# EAGLE board PaddleClock-base-v1a (EAGLE 5.07)
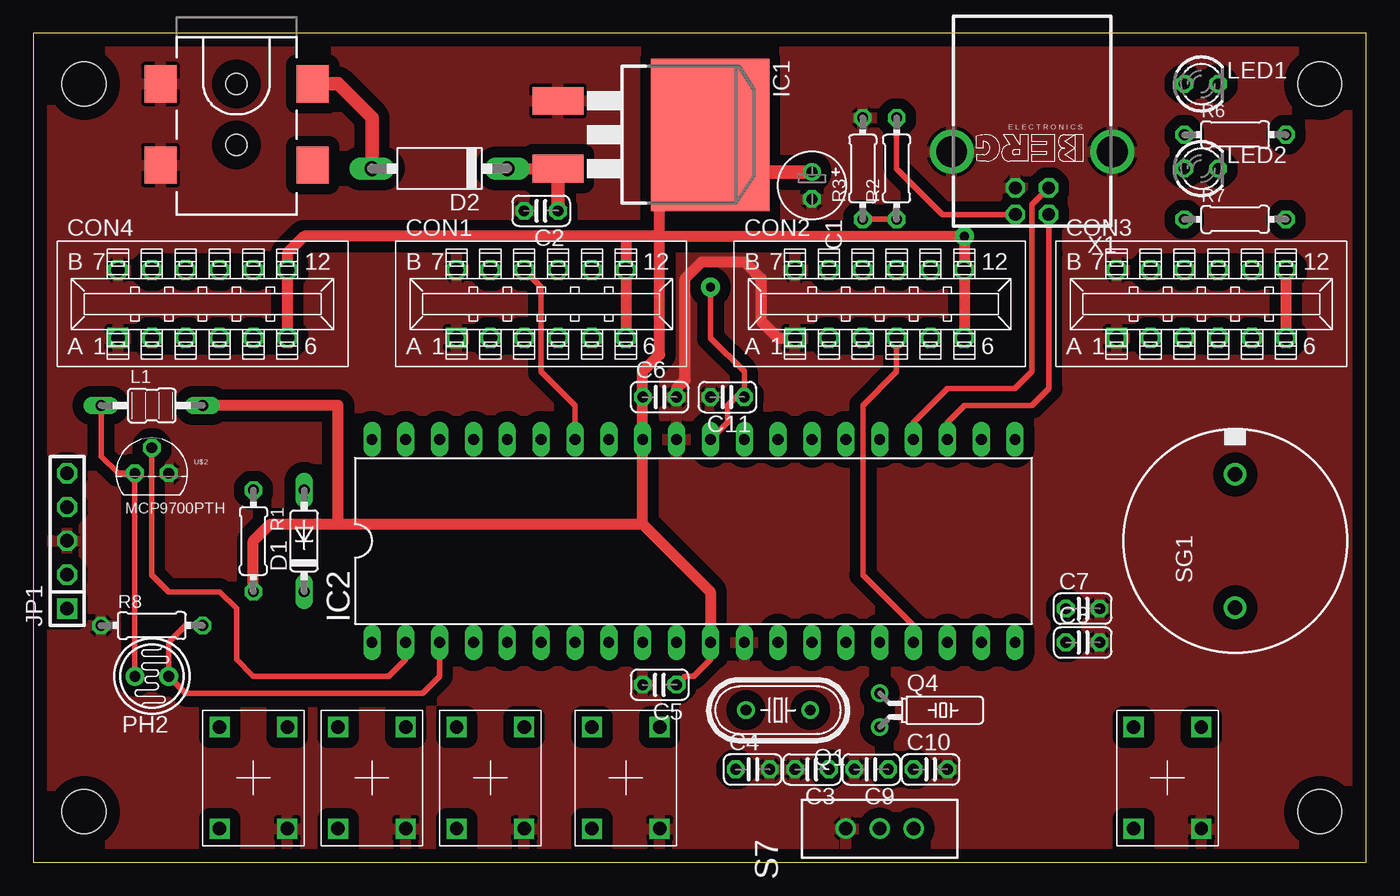
[diagram p0: board, top side]
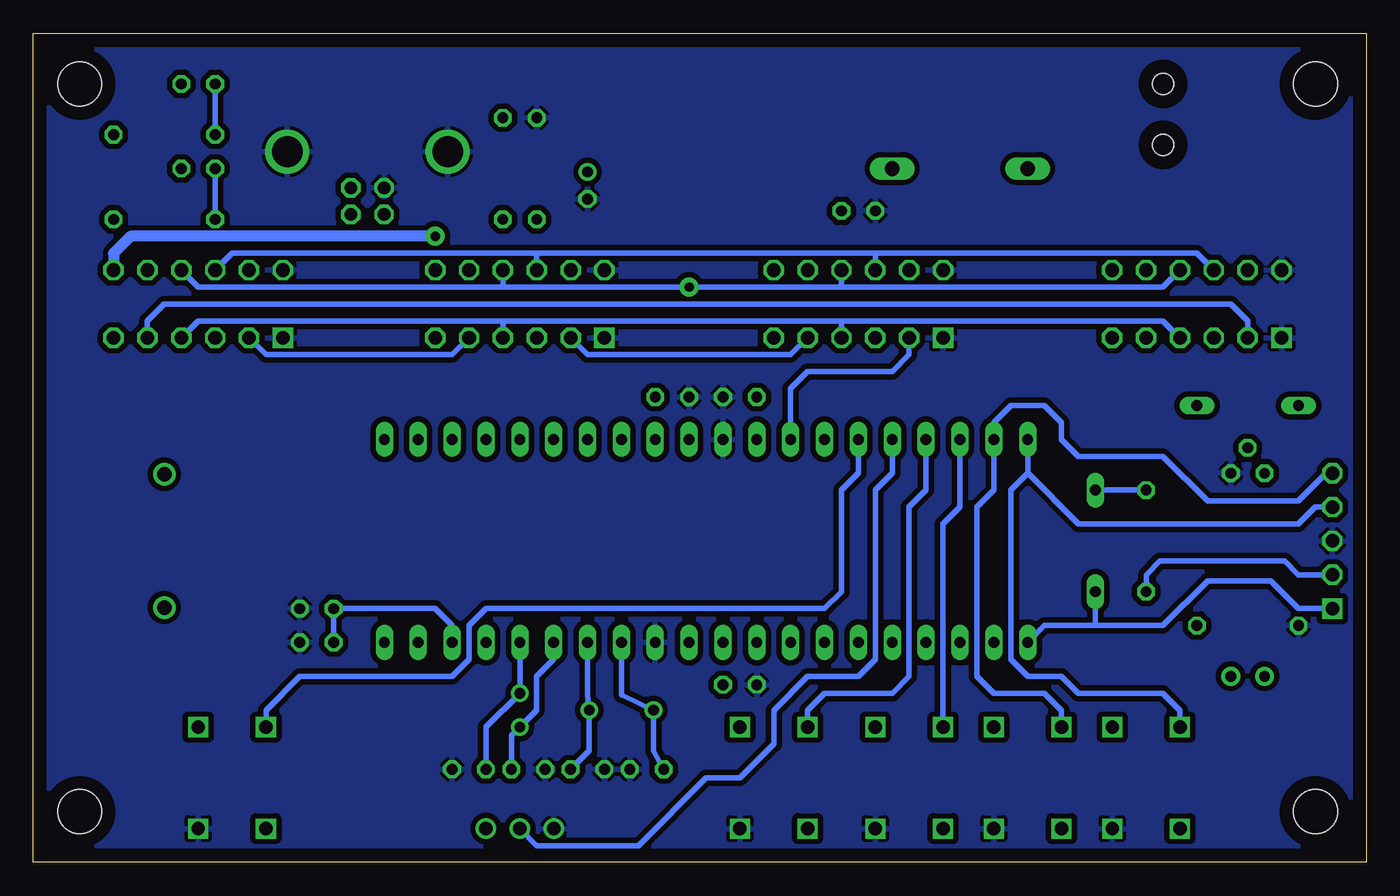
[diagram p1: board, bottom side, seen from below]

Size 100 x 62.22 mm. Coordinates in mm from the lower left corner, seen from the top.
Outline: 0,0 100,0 100,62.22 0,62.22 0,0
Copper layers (1*16): Top 0.035mm / dielectric 1.5mm / Bottom 0.035mm
Design rules "default": minimum track width 10mil, minimum drill 24mil, track to track 8mil, track to pad 8mil, pad to pad 8mil, via to via 8mil, smd to smd 8mil, copper to edge 40mil, drill to drill 8mil, minimum pad ring 10mil, minimum via ring 8mil, stop-mask expansion 4mil, vias tented up to drill 0mil, thermal gap 10mil

## Footprints (pad centres in the part's own frame; a part is rotated, then mirrored left to right if it is on the bottom)
E2-5 = drill 0.813 pad 1.27 round: + -1.016,0 | drill 0.813 pad 1.27 octagon: - 1.016,0
C025-024X044 = drill 0.813 octagon: 1 -1.27,0; 2 1.27,0
EDGE_CONNECTOR_6X2 = drill 1.02 square: 1 -6.35,-2.54 | drill 1.02 octagon: 2 -3.81,-2.54; 3 -1.27,-2.54; 4 1.27,-2.54; 5 3.81,-2.54; 6 6.35,-2.54; 7 -6.35,2.54; 8 -3.81,2.54; 9 -1.27,2.54; 10 1.27,2.54; 11 3.81,2.54; 12 6.35,2.54
DO35-7 = drill 0.813 long: A 3.81,0; C -3.81,0
P1-10 = drill 1.118 long: A 5.08,0; C -5.08,0
D2PACK = smd 2.083 x 3.81: 1 -2.54,-8.89; 3 2.54,-8.89 | smd 11.43 x 8.89: 2 0,2.54
DIL40 = drill 0.813 long: 1 -24.13,-7.62; 2 -21.59,-7.62; 3 -19.05,-7.62; 4 -16.51,-7.62; 5 -13.97,-7.62; 6 -11.43,-7.62; 7 -8.89,-7.62; 8 -6.35,-7.62; 9 -3.81,-7.62; 10 -1.27,-7.62; 11 1.27,-7.62; 12 3.81,-7.62; 13 6.35,-7.62; 14 8.89,-7.62; 15 11.43,-7.62; 16 13.97,-7.62; 17 16.51,-7.62; 18 19.05,-7.62; 19 21.59,-7.62; 20 24.13,-7.62; 21 24.13,7.62; 22 21.59,7.62; 23 19.05,7.62; 24 16.51,7.62; 25 13.97,7.62; 26 11.43,7.62; 27 8.89,7.62; 28 6.35,7.62; 29 3.81,7.62; 30 1.27,7.62; 31 -1.27,7.62; 32 -3.81,7.62; 33 -6.35,7.62; 34 -8.89,7.62; 35 -11.43,7.62; 36 -13.97,7.62; 37 -16.51,7.62; 38 -19.05,7.62; 39 -21.59,7.62; 40 -24.13,7.62
POWER_JACK_SMD = smd 2.8 x 2.4: GND 0,-5.7; P$4 6.1,-5.7; VIN0 0,5.7; VIN1 6.1,5.7 | hole 1.6: 0,0; 4.572,0
1X05 = drill 1.016 square: 1 -5.08,0 | drill 1.016 octagon: 2 -2.54,0; 3 0,0; 4 2.54,0; 5 5.08,0
MMICC7 = drill 0.813 long: 1 -3.81,0; 2 3.81,0
LED3MM = drill 0.813 octagon: A -1.27,0; K 1.27,0
TO46-VT200 = drill 0.8 pad 1.4 round: 1 -1.27,0; 2 1.27,0
HC49U-V = drill 0.813 round: 1 -2.413,0; 2 2.413,0
TC26H = drill 0.813 round: 1 -1.27,0; 2 1.27,0
0204/7 = drill 0.813 octagon: 1 -3.81,0; 2 3.81,0
KSA_SEALED_TAC_SWITCH = drill 1 square: P$1 -3.81,2.54; P$2 3.81,2.54; P$3 -3.81,-2.54; P$4 3.81,-2.54
SWITCH-SPDT = drill 1.016 round: 1 0,2.54; 2 0,0; 3 0,-2.54
EFBAA40D101 = drill 1.1 pad 1.676 round: 1 -5,0; 2 5,0
STAND-OFF = hole 3.302: 0,0
TO-92 = drill 0.813 octagon: 1 -1.27,0; 2 0,1.905; 3 1.27,0
PN61729-S = drill 0.95 octagon: 1 1.25,4.71; 2 -1.25,4.71; 3 -1.25,2.71; 4 1.25,2.71 | drill 2.3 pad 2.9 round: S1 -6.02,0; S2 6.02,0

## Placement (x,y rotation side)
C1  [E2-5]  58.42,50.8 270 top
C2  [C025-024X044]  38.1,48.9 180 top
C3  [C025-024X044]  58.42,6.99 180 top
C4  [C025-024X044]  53.98,6.99 0 top
C5  [C025-024X044]  46.99,13.34 180 top
C6  [C025-024X044]  46.99,34.92 0 top
C7  [C025-024X044]  78.74,19.05 0 top
C8  [C025-024X044]  78.74,16.51 0 top
C9  [C025-024X044]  62.87,6.99 180 top
C10  [C025-024X044]  67.31,6.99 0 top
C11  [C025-024X044]  52.07,34.92 180 top
CON1  EDGE_CONNECTOR_6X2  [EDGE_CONNECTOR_6X2]  38.1,41.91 0 top
CON2  EDGE_CONNECTOR_6X2  [EDGE_CONNECTOR_6X2]  63.5,41.91 0 top
CON3  EDGE_CONNECTOR_6X2  [EDGE_CONNECTOR_6X2]  87.63,41.91 0 top
CON4  EDGE_CONNECTOR_6X2  [EDGE_CONNECTOR_6X2]  12.7,41.91 0 top
D1  1N4148DO35-7  [DO35-7]  20.32,24.13 90 top
D2  BA157  [P1-10]  30.48,52.07 180 top
IC1  LD117AD2MTR  [D2PACK]  48.26,54.61 270 top
IC2  PIC18F4550_40  [DIL40]  49.53,24.13 0 top
J1  POWER_JACKSMD  [POWER_JACK_SMD]  15.24,58.42 270 top
JP1  [1X05]  2.54,24.13 90 top
L1  MMICC7  [MMICC7]  8.89,34.29 0 top
LED1  [LED3MM]  87.63,58.42 0 top
LED2  [LED3MM]  87.63,52.07 0 top
PH2  VT20N1  [TO46-VT200]  8.89,13.97 0 top
Q1  [HC49U-V]  55.88,11.43 180 top
Q4  [TC26H]  63.5,11.43 270 top
R1  [0204/7]  16.51,24.13 270 top
R2  100K  [0204/7]  64.77,52.07 90 top
R3  100K  [0204/7]  62.23,52.07 90 top
R6  [0204/7]  90.17,54.61 0 top
R7  [0204/7]  90.17,48.26 0 top
R8  [0204/7]  8.89,17.78 0 top
S1  [KSA_SEALED_TAC_SWITCH]  85.09,6.35 270 top
S3  [KSA_SEALED_TAC_SWITCH]  44.45,6.35 270 top
S4  [KSA_SEALED_TAC_SWITCH]  34.29,6.35 270 top
S5  [KSA_SEALED_TAC_SWITCH]  25.4,6.35 270 top
S6  [KSA_SEALED_TAC_SWITCH]  16.51,6.35 270 top
S7  [SWITCH-SPDT]  63.5,2.54 90 top
SG1  EFBAA40D101  [EFBAA40D101]  90.17,24.13 90 top
U$1  STAND-OFF  [STAND-OFF]  3.81,58.42 0 top
U$2  MCP9700PTH  [TO-92]  8.89,29.21 0 top
U$3  STAND-OFF  [STAND-OFF]  3.81,3.81 0 top
U$4  STAND-OFF  [STAND-OFF]  96.52,3.81 0 top
U$5  STAND-OFF  [STAND-OFF]  96.52,58.42 0 top
X1  PN61729-S  [PN61729-S]  74.93,53.34 180 top

## Library data of the parts
C1-C11 R1-R3 R6-R8 = rcl
CON1-CON4 = dp_devices
D1 D2 = diode
IC1 = v-reg
IC2 = microchip
J1 S1 S3-S7 U$1-U$5 = SparkFun
JP1 = pinhead-2
L1 = inductors
LED1 LED2 = led
PH2 = photo-elements
Q1 Q4 = crystal
SG1 = buzzer
X1 = con-berg

## Nets
!OE: CON1.4 CON2.4 CON3.4 CON4.4 IC2.17
BUT_AE: IC2.36 S7.2
BUT_AL: IC2.40 JP1.4 S6.P$3
BUT_DN: IC2.39 JP1.5 S5.P$3
BUT_SET: IC2.37 S3.P$3
BUT_SNZ: IC2.35 S1.P$3
BUT_UP: IC2.38 S4.P$3
CLK: CON1.9 CON2.9 CON3.9 CON4.9 IC2.34
DO: CON1.2 IC2.33
GND: C1.- C2.2 C3.2 C4.2 C5.2 C6.2 C7.2 C8.2 C9.2 C10.2 C11.2 CON1.1 CON1.7 CON2.1 CON2.7 CON3.1 CON3.7 CON4.1 CON4.7 IC1.1 IC2.12 IC2.31 J1.GND J1.P$4 JP1.3 R3.2 R8.1 S1.P$2 S3.P$2 S4.P$2 S5.P$2 S6.P$2 S7.1 U$2.3 X1.4 X1.S1 X1.S2
LAT: C11.1 CON1.10 CON2.10 CON3.10 CON4.10 IC2.30
MCLR: D1.C IC2.1 JP1.1
N$1: IC2.23 X1.2
N$2: IC2.24 X1.3
N$3: CON1.5 CON2.2
N$4: C2.1 D2.C IC1.3
N$5: CON3.5 CON4.2
N$8: D1.A R1.1
N$9: R2.2 X1.1
N$10: R2.1 R3.1
N$11: L1.1 PH2.1 U$2.1
N$12: SG1.2
N$13: SG1.1
N$14: LED1.A R6.1
N$15: C7.1 C8.1 IC2.18
N$16: CON2.5 CON3.2
N$18: LED2.A R7.1
N$20: IC2.4
N$21: IC2.5
N$22: IC2.6
N$23: IC2.7
N$24: D2.A J1.VIN0
N$26: C9.1 IC2.15 Q4.2
N$27: C10.1 IC2.16 Q4.1
N$28: C3.1 IC2.14 Q1.1
N$29: C4.1 IC2.13 Q1.2
PHOTOR: IC2.3 PH2.2 R8.2
TEMP: IC2.2 U$2.2
V+: C1.+ C5.1 C6.1 CON1.6 CON1.12 CON2.6 CON2.12 CON3.6 CON3.12 CON4.6 CON4.12 IC1.2 IC2.11 IC2.32 JP1.2 L1.2 R1.2

## Tracks (layer width: path | path; a pad name or v marks a point on that pad's centre or on a via)
!OE
  Top 0.406: IC2.17 66.04,17.78 62.23,21.59 62.23,34.29 64.77,36.83 CON2.4
  Bottom 0.406: 39.37,40.64 15.24,40.64 CON4.4 | 39.37,40.64 64.77,40.64 | 64.77,40.64 87.63,40.64 CON3.4 | 39.37,40.64 CON1.4 | 64.77,40.64 CON2.4
BUT_AE
  Bottom 0.406: S7.2 62.23,1.27 54.61,1.27 49.53,6.35 46.99,6.35 44.45,8.89 44.45,11.43 41.91,13.97 38.1,13.97 36.83,15.24 36.83,27.94 35.56,29.21 IC2.36
BUT_AL
  Bottom 0.406: S6.P$3 13.97,11.43 15.24,12.7 21.59,12.7 22.86,13.97 25.4,13.97 26.67,15.24 26.67,27.94 25.4,29.21 | 25.4,29.21 IC2.40 | 25.4,29.21 21.59,25.4 5.08,25.4 3.81,26.67 JP1.4
BUT_DN
  Bottom 0.406: S5.P$3 22.86,11.43 24.13,12.7 27.94,12.7 29.21,13.97 29.21,26.67 27.94,27.94 IC2.39 27.94,33.02 26.67,34.29 24.13,34.29 22.86,33.02 22.86,31.75 21.59,30.48 15.24,30.48 11.89,27.13 5.08,27.13 3,29.21 JP1.5
BUT_SET
  Bottom 0.406: S3.P$3 41.91,11.43 40.64,12.7 35.56,12.7 34.29,13.97 34.29,26.67 33.02,27.94 IC2.37
BUT_SNZ
  Bottom 0.406: IC2.35 38.1,29.21 39.37,27.94 39.37,20.32 40.64,19.05 66.04,19.05 67.31,17.78 67.31,15.24 68.58,13.97 80.01,13.97 82.55,11.43 S1.P$3
BUT_UP
  Bottom 0.406: S4.P$3 31.75,25.4 30.48,26.67 IC2.38
CLK
  Top 0.406: IC2.34 40.64,34.29 38.1,36.83 38.1,43.18 CON1.9
  Bottom 0.406: CON4.9 12.7,45.72 36.83,45.72 | 36.83,45.72 CON1.9 | 36.83,45.72 62.23,45.72 | 62.23,45.72 CON2.9 | 62.23,45.72 85.09,45.72 CON3.9
DO
  Bottom 0.406: CON1.2 34.29,38.1 35.56,36.83 41.91,36.83 43.18,35.56 IC2.33
GND
  Top 0.813: CON2.1 55.88,39.37 54.61,40.64 54.61,43.81 53.34,45.09 50.16,45.09 48.9,43.81 48.9,36.2 48.26,35.56 C6.2
  pour Bottom (isolate 0.406): 0,62.23 100.33,62.23 100.33,0 0,0
  pour Top (isolate 0.813): 0,62.23 100.33,62.23 100.33,0 0,0
LAT  (via drill 0.7 pad 1.42)
  Top 0.406: IC2.30 52.07,33.02 52.07,34.29 52.7,34.92 C11.1 53.34,36.83 50.8,39.37 v50.8,43.18
  Bottom 0.406: CON4.10 15.24,43.18 39.37,43.18 | 39.37,43.18 CON1.10 | 39.37,43.18 v50.8,43.18 64.77,43.18 | 64.77,43.18 CON2.10 | 64.77,43.18 87.63,43.18 CON3.10
MCLR
  Bottom 0.406: 20.32,17.78 15.24,17.78 11.89,21.13 7.16,21.13 5.08,19.05 JP1.1 | 20.32,17.78 24.13,17.78 IC2.1 | 20.32,17.78 D1.C
N$1
  Top 0.406: IC2.23 68.58,33.02 69.85,34.29 74.93,34.29 76.2,35.56 76.2,45.72 76.18,45.74 X1.2
N$2
  Top 0.406: X1.3 74.93,49.38 74.93,36.83 73.66,35.56 68.58,35.56 66.04,33.02 IC2.24
N$3
  Bottom 0.406: CON1.5 43.18,38.1 58.42,38.1 CON2.2
N$4
  Top 0.813: D2.C IC1.3
  Top 1.016: IC1.3 C2.1
N$5
  Bottom 0.406: CON4.2 8.89,40.64 10.16,41.91 90.17,41.91 91.44,40.64 CON3.5
N$8
  Bottom 0.406: R1.1 D1.A
N$9
  Top 0.406: X1.1 68.21,48.63 64.77,52.07 R2.2
N$10
  Top 0.406: R3.1 R2.1
N$11
  Top 0.406: PH2.1 U$2.1 6.35,29.21 5.08,30.48 L1.1
N$14
  Bottom 0.406: R6.1 LED1.A
N$15
  Bottom 0.406: IC2.18 68.58,17.78 69.85,19.05 C7.1 C8.1
N$16
  Bottom 0.406: CON3.2 82.55,38.1 68.58,38.1 CON2.5
N$18
  Bottom 0.406: R7.1 LED2.A
N$24
  Top 1.016: J1.VIN0 22.86,58.42 25.4,55.88 D2.A
N$26
  Bottom 0.406: C9.1 64.14,9.53 Q4.2 62.23,11.43 62.23,13.97 60.96,15.24 IC2.15
N$27
  Bottom 0.406: IC2.16 Q4.1 66.04,10.16 C10.1
N$28
  Bottom 0.406: IC2.14 58.42,12.57 Q1.1 58.29,8.38 C3.1
N$29
  Bottom 0.406: IC2.13 55.88,12.57 Q1.2 53.47,8.38 C4.1
PHOTOR
  Top 0.406: R8.2 11.43,17.78 10.16,16.51 PH2.2 11.43,12.7 29.21,12.7 30.48,13.97 IC2.3
TEMP
  Top 0.406: U$2.2 8.89,21.59 10.16,20.32 13.97,20.32 15.24,19.05 15.24,15.24 16.51,13.97 26.67,13.97 27.94,15.24 IC2.2
V+  (via drill 0.7 pad 1.42)
  Top 0.406: IC2.11 50.8,15.24 49.53,13.97 48.9,13.97 C5.1
  Top 0.813: 45.72,25.4 IC2.32 C6.1 45.72,36.83 46.99,38.1 46.99,46.99 | 45.72,25.4 50.8,20.32 IC2.11 | 44.45,46.99 20.32,46.99 19.05,45.72 CON4.12 CON4.6 | 44.45,46.99 CON1.12 CON1.6 | 46.99,46.99 44.45,46.99 | 46.99,46.99 v69.85,46.99 CON2.12 CON2.6 | L1.2 22.86,34.29 22.86,25.4 | 22.86,25.4 45.72,25.4 | 22.86,25.4 17.78,25.4 16.51,24.13 R1.2 | 46.99,46.99 46.99,53.34 48.26,54.61 IC1.2 | CON3.12 CON3.6
  Top 1.016: C1.+ 53.59,51.82 IC1.2
  Bottom 0.406: R1.2 16.51,21.59 15.47,22.63 6.12,22.63 5.08,21.59 JP1.2
  Bottom 0.813: v69.85,46.99 92.71,46.99 93.98,45.72 CON3.12

## Text on the board
Top: standard case spacing? | correct buttons?